# Altium PCB PCB_sonnn_2_2025-09-09.pcbdoc (part 1 of 2)
Units mm, origin at the board's own origin, x right, y up, seen from the top; angles counter-clockwise.
Board outline 165.65 x 105.65 mm, 2 copper layers (Top Layer, Bottom Layer); 104 components, 42 nets, 251 pads, 109 vias.
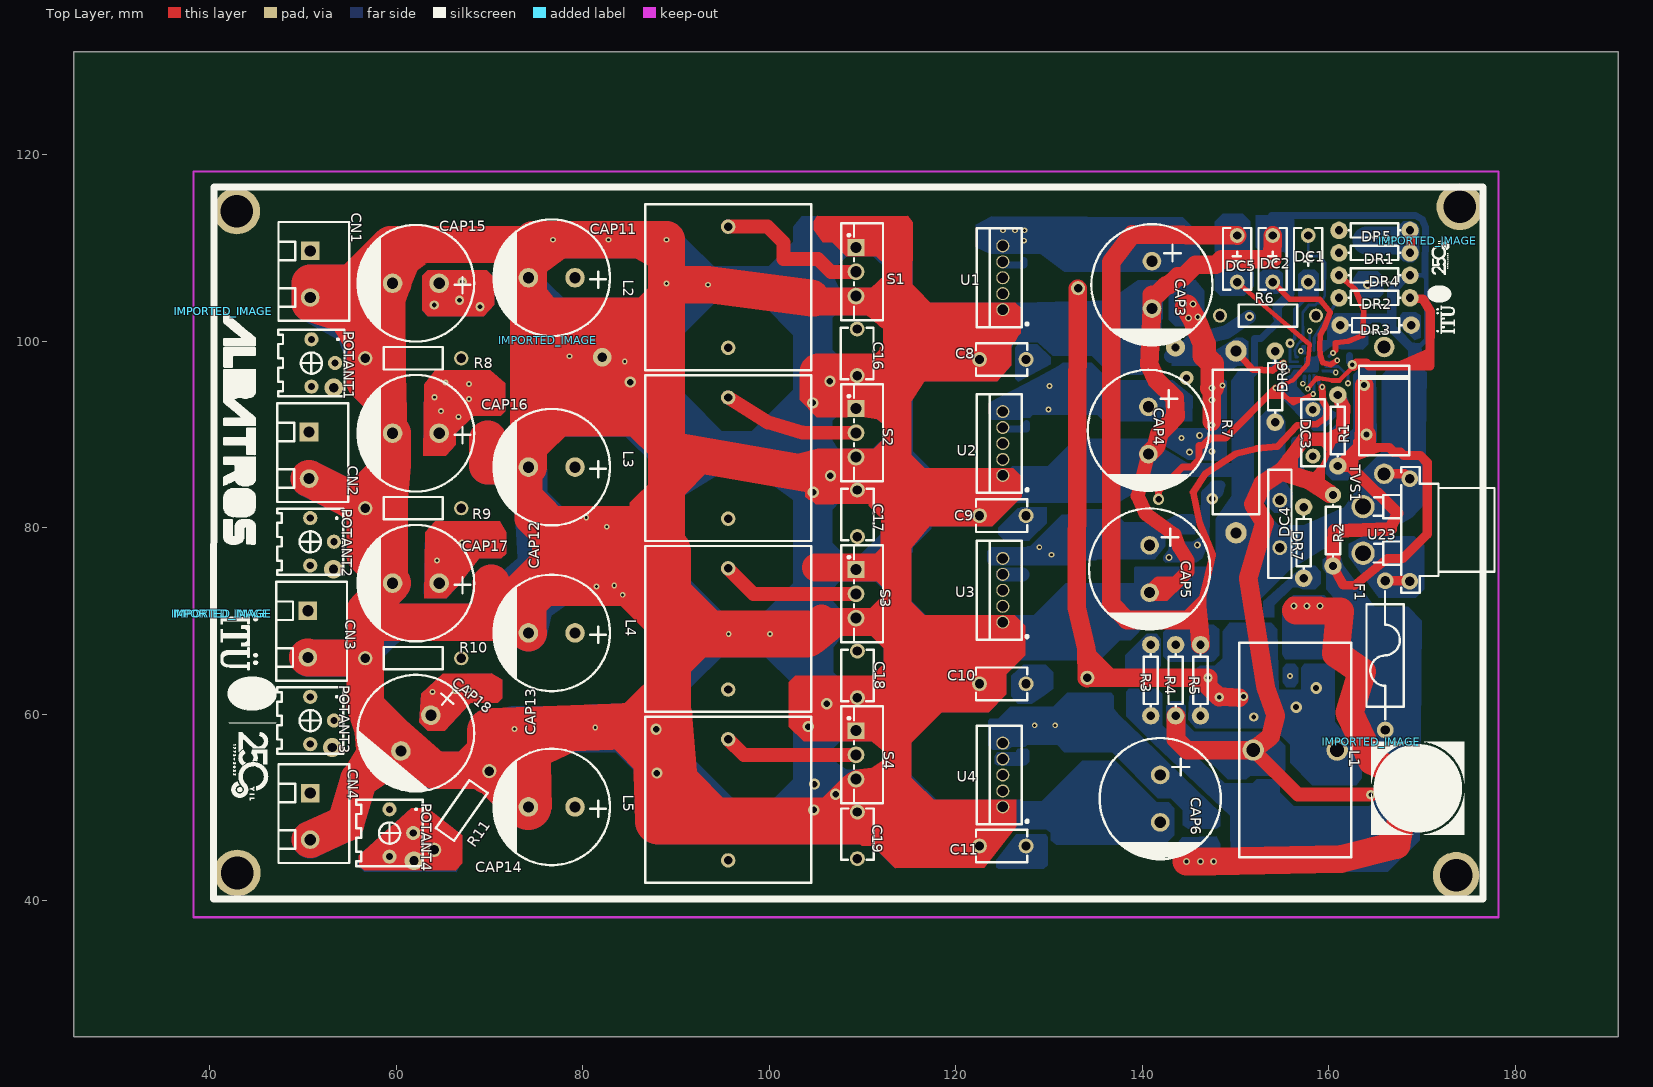
[diagram p0: Top Layer view]
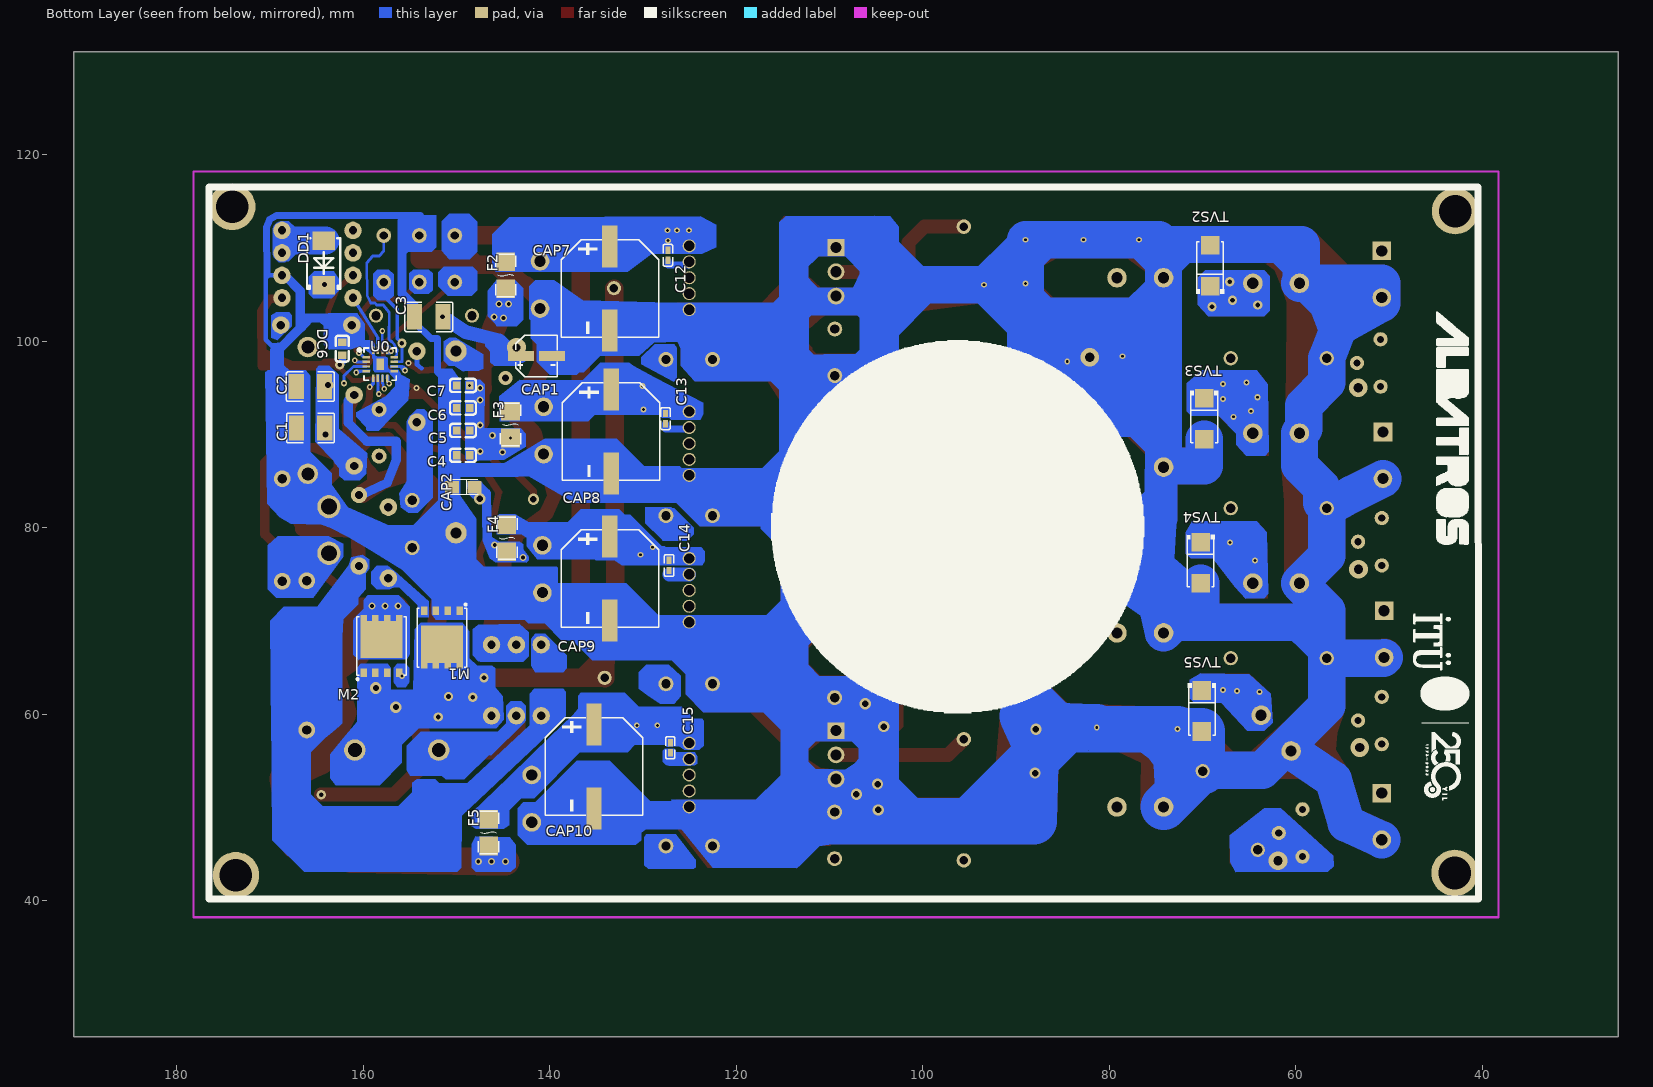
[diagram p1: Bottom Layer view, seen from below]

## Layer stack, top to bottom
Top Layer: signal copper (thickness not stored)
Dielectric: dielectric 0.32, FR-4, Dk 4.8
Bottom Layer: signal copper (thickness not stored)

## Board outline
191.054,25.4 25.4,25.4 25.4,131.054 191.054,131.054

## Components (designator, comment, footprint, x,y, rotation, side; value= is the part's Value field where it differs from the comment)
C1 "10uF" C1210 165.666,90.709 r0 bottom
C2 "10uF" C1210 165.685,95.142 r0 bottom
C3 "10uF" C1210 152.985,102.635 r0 bottom
C4 "47uF" C0603 149.302,87.776 r0 bottom
C5 "47uF" C0603 149.302,90.443 r0 bottom
C6 "47uF" C0603 149.302,92.856 r0 bottom
C7 "47uF" C0603 149.302,95.269 r0 bottom
C8 "1uF" CAP-TH_L5.5-W3.5-P5.00-D1.2 125.045,98.064 r180 top
C9 "1uF" CAP-TH_L5.5-W3.5-P5.00-D1.2 125.045,81.3 r180 top
C10 "1uF" CAP-TH_L5.5-W3.5-P5.00-D1.2 125.045,63.265 r180 top
C11 "1uF" CAP-TH_L5.5-W3.5-P5.00-D1.2 125.045,45.866 r180 top
C12 "1uF" C0402 127.331,109.24 r270 bottom
C13 "1uF" C0402 127.585,91.714 r270 bottom
C14 "1uF" C0402 127.204,75.966 r270 bottom
C15 "1uF" C0402 127.077,56.408 r90 bottom
C16 "1uF" CAP-TH_L5.5-W3.5-P5.00-D1.2 109.424,98.826 r270 top
C17 "1uF" CAP-TH_L5.5-W3.5-P5.00-D1.2 109.448,81.556 r270 top
C18 "1uF" CAP-TH_L5.5-W3.5-P5.00-D1.2 109.448,64.281 r270 top
C19 "1uF" CAP-TH_L5.5-W3.5-P5.00-D1.2 109.448,47.009 r90 top
CAP1 "1uF" CAP-SMD_BD4.0-L4.3-W4.3-FD-LS5.3 141.428,98.444 r0 bottom
CAP2 "68uF" CASE-A_3216 149.304,84.347 r180 bottom
CAP3 "470uF" CAP-TH_BD13.0-P5.00-D1.2-FD 141.049,106.064 r270 top
CAP4 "470uF" CAP-TH_BD13.0-P5.00-D1.2-FD 140.668,90.443 r270 top
CAP5 "470uF" CAP-TH_BD13.0-P5.00-D1.2-FD 140.795,75.584 r270 top
CAP6 "470uF" CAP-TH_BD13.0-P5.00-D1.2-FD 141.938,50.946 r270 top
CAP7 "220uF" CAP-SMD_BD10.0-L10.3-W10.3-LS11.0-FD 133.554,105.684 r90 bottom
CAP8 "220uF" CAP-SMD_BD10.0-L10.3-W10.3-LS11.0-FD 133.427,90.317 r90 bottom
CAP9 "220uF" CAP-SMD_BD10.0-L10.3-W10.3-LS11.0-FD 133.554,74.569 r90 bottom
CAP10 "220uF" CAP-SMD_BD10.0-L10.3-W10.3-LS11.0-FD 135.266,54.409 r90 bottom
CAP11 "1000uF" CAP-TH_BD12.5-P5.00-D0.6-FD 76.66,106.826 r180 top
CAP12 "1000uF" CAP-TH_BD12.5-P5.00-D0.6-FD 76.66,86.506 r180 top
CAP13 "1000uF" CAP-TH_BD12.5-P5.00-D0.6-FD 76.66,68.726 r180 top
CAP14 "1000uF" CAP-TH_BD12.5-P5.00-D0.6-FD 76.66,50.057 r180 top
CAP15 "1000uF" CAP-TH_BD12.5-P5.00-D0.6-FD 62.088,106.234 r180 top
CAP16 "1000uF" CAP-TH_BD12.5-P5.00-D0.6-FD 62.088,90.146 r180 top
CAP17 "1000uF" CAP-TH_BD12.5-P5.00-D0.6-FD 62.088,74.06 r180 top
CAP18 "1000uF" CAP-TH_BD12.5-P5.00-D0.6-FD 62.088,57.974 r230 top
CN1 "MX301-5.0-02P-BU01-CU-Y-A" CONN-TH_2P-P5.0-MX301-5.0-02P-BU01-CU-Y-A 50.751,107.207 r270 top
CN2 "MX301-5.0-02P-BU01-CU-Y-A" CONN-TH_2P-P5.0-MX301-5.0-02P-BU01-CU-Y-A 50.624,87.776 r270 top
CN3 "MX301-5.0-02P-BU01-CU-Y-A" CONN-TH_2P-P5.0-MX301-5.0-02P-BU01-CU-Y-A 50.497,68.599 r270 top
CN4 "MX301-5.0-02P-BU01-CU-Y-A" CONN-TH_2P-P5.0-MX301-5.0-02P-BU01-CU-Y-A 50.751,49.041 r270 top
DC1 "100nF" CAP-TH_L6.5-W3.0-P5.00-D0.6 157.811,108.858 r270 top
DC2 "100nF" CAP-TH_L6.5-W3.0-P5.00-D0.6 154.001,108.858 r270 top
DC3 "1.2nF" CAP-TH_L7.2-W2.5-P5.00-D0.5 158.319,90.189 r270 top
DC4 "22nF" CAP-TH_L11.5-W2.5-P5.00-D1.0 154.763,80.41 r90 top
DC5 "100pF" CAP-TH_L6.5-W3.0-P5.00-D0.6 150.191,108.858 r270 top
DC6 "0.1uF" C0603 162.266,99.209 r90 bottom
DD1 "SS1060-SMB" SMB_L4.4-W3.6-LS5.3-RD 164.266,108.409 r270 bottom
DR1 "1k" R_AXIAL-0.3#1 164.923,109.493 r0 top
DR2 "357k" R_AXIAL-0.3#1 164.923,104.667 r0 top
DR3 "47.5k" R_AXIAL-0.3#1 165.05,101.747 r0 top
DR4 "76.8k" R_AXIAL-0.3#1 164.923,107.08 r0 top
DR5 "2.0" R_AXIAL-0.3#1 164.923,111.906 r0 top
DR6 "15.4k" R_AXIAL-0.3#1 154.255,95.142 r90 top
DR7 "2" R_AXIAL-0.3#1 157.316,78.409 r270 top
F1 "32NM-150H" FUSE-TH_BD4.0-L11.0-P15.00-D0.6 166.066,66.313 r270 top
F2 "JFC1206-1800FS" F1206 144.73,107.08 r270 bottom
F3 "JFC1206-1800FS" F1206 144.222,91.078 r270 bottom
F4 "JFC1206-1800FS" F1206 144.603,78.886 r270 bottom
F5 "JFC1206-1800FS" F1206 146.566,47.309 r270 bottom
IMPORTED_IMAGE "IMPORTED_IMAGE" IMPORTED_IMAGE 41.372,70.755 r0 top
IMPORTED_IMAGE "IMPORTED_IMAGE" IMPORTED_IMAGE 41.416,103.206 r0 top
IMPORTED_IMAGE "IMPORTED_IMAGE" IMPORTED_IMAGE 76.225,100.127 r0 top
IMPORTED_IMAGE "IMPORTED_IMAGE" IMPORTED_IMAGE 170.614,110.821 r0 top
IMPORTED_IMAGE "IMPORTED_IMAGE" IMPORTED_IMAGE 164.575,57.059 r0 top
IMPORTED_IMAGE "IMPORTED_IMAGE" IMPORTED_IMAGE 41.416,103.206 r0 top
IMPORTED_IMAGE "IMPORTED_IMAGE" IMPORTED_IMAGE 41.132,70.755 r0 top
L1 "22uH" IND-TH_L23.0-W12.0-P9.00-D1.3 156.414,56.153 r270 top
L2 "47uH" IND-TH_L17.8-W17.8-P13.00-D0.6 95.582,105.811 r270 top
L3 "47uH" IND-TH_L17.8-W17.8-P13.00-D0.6 95.582,87.48 r270 top
L4 "47uH" IND-TH_L17.8-W17.8-P13.00-D0.6 95.582,69.15 r270 top
L5 "47uH" IND-TH_L17.8-W17.8-P13.00-D0.6 95.582,50.82 r270 top
M1 "BSC123N08NS3G" PG-TDSON-8_L5.0-W6.0-P1.27-LS6.2-BL-EP 151.588,68.219 r180 bottom
M2 "BSC123N08NS3G" PG-TDSON-8_L5.0-W6.0-P1.27-LS6.2-BL-EP 158.066,67.309 r0 bottom
POTANT1 "30kΩ" RES-ADJ-TH_3362P 52.148,97.682 r270 top
POTANT2 "30kΩ" RES-ADJ-TH_3362P 52.021,78.505 r270 top
POTANT3 "30kΩ" RES-ADJ-TH_3362P 52.021,59.328 r270 top
POTANT4 "30kΩ" RES-ADJ-TH_3362P 60.53,47.263 r270 top
R1 "10m" R_AXIAL-0.3#1 160.986,90.443 r90 top
R2 "10m" R_AXIAL-0.3#2 160.466,79.709 r90 top
R3 "10" R_AXIAL-0.3#1 140.92,63.646 r270 top
R4 "10" R_AXIAL-0.3#1 143.587,63.646 r270 top
R5 "NOT POPULATED" R_AXIAL-0.3#1 146.254,63.646 r270 top
R6 "523kΩ" RES-TH_BD2.4-L6.3-P10.30-D0.6 153.493,102.762 r0 top
R7 "22kΩ" RES-TH_BD5.0-L15.5-P19.50-D0.8 150.066,89.209 r270 top
R8 "1kΩ" RES-TH_BD2.4-L6.3-P10.30-D0.6 61.8,98.19 r180 top
R9 "1kΩ" RES-TH_BD2.4-L6.3-P10.30-D0.6 61.8,82.104 r180 top
R10 "1kΩ" RES-TH_BD2.4-L6.3-P10.30-D0.6 61.8,66.016 r180 top
R11 "1kΩ" RES-TH_BD2.4-L6.3-P10.30-D0.6 67.007,49.676 r55 top
S1 "MBRF2060CTDH" ITO-220AB-3_L10.2-W4.5-P2.60-L 109.298,107.46 r270 top
S2 "MBRF2060CTDH" ITO-220AB-3_L10.2-W4.5-P2.60-L 109.298,90.188 r270 top
S3 "MBRF2060CTDH" ITO-220AB-3_L10.2-W4.5-P2.60-L 109.298,72.916 r270 top
S4 "MBRF2060CTDH" ITO-220AB-3_L10.2-W4.5-P2.60-L 109.298,55.641 r270 top
TVS1 "1.5KE27A_C521812" DO-201_BD5.3-L9.5-P13.50-D1.4-RD 165.96,92.595 r270 top
TVS2 "SM4T26AY" SMA_L4.3-W2.6-LS5.1-RD 69.165,108.097 r270 bottom
TVS3 "SM4T26AY" SMA_L4.3-W2.6-LS5.1-RD 69.8,91.714 r90 bottom
TVS4 "SM4T26AY" SMA_L4.3-W2.6-LS5.1-RD 70.181,76.26 r90 bottom
TVS5 "SM4T26AY" SMA_L4.3-W2.6-LS5.1-RD 70.054,60.345 r90 bottom
U0 "TPS43060RTER" WQFN-16_L3.0-W3.0-P0.50-TL-EP 158.192,97.556 r0 bottom
U1 "XL4016" TO220-5L_L10.16-W4.5-P1.71-L 125.045,106.826 r90 top
U2 "XL4016" TO220-5L_L10.16-W4.5-P1.71-L 125.045,89.046 r90 top
U3 "XL4016" TO220-5L_L10.16-W4.5-P1.71-L 125.045,73.298 r90 top
U4 "XL4016" TO220-5L_L10.16-W4.5-P1.71-L 125.045,53.486 r90 top
U23 "XT30PW-F" CONN-TH_XT30PW-F-1 166.193,79.776 r90 top

## Footprints (in the part's own frame and the unit in brackets; to place one, negate y for a bottom-side part, rotate by r counter-clockwise, add the part's x,y. Pads: shape width x height; smd on the part's side, far side on the other; paste and mask are expansions set on the pad)
C0402 [mm]
  rect 0.79x0.54 smd paste-100 mask+0.051: 1(0.545,0) 2(-0.545,0)
  silkscreen extent -1.17,-0.5 1.17,0.5
C0603 [mm]
  rect 0.8x0.9 smd paste+0 mask+0.051: 1(0.7,0) 2(-0.7,0)
  silkscreen extent -1.39,-0.72 1.41,0.71
C1210 [mm]
  rect 1.635x2.7 smd paste-100 mask+0.051: 1(1.517,0) 2(-1.517,0)
  silkscreen extent -2.56,-1.58 2.56,1.58
CAP-SMD_BD4.0-L4.3-W4.3-FD-LS5.3 [mm]
  rect 2.8x1.1 smd paste+0 mask+0.051: 1(1.66,0) 2(-1.66,0)
  silkscreen extent -2.24,-2.23 2.22,2.23
CAP-SMD_BD10.0-L10.3-W10.3-LS11.0-FD [mm]
  rect 4.5x1.65 smd paste+0 mask+0.051: 1(4.5,0) 2(-4.5,0)
  silkscreen extent -5.23,-5.23 5.23,5.23
CAP-TH_BD12.5-P5.00-D0.6-FD [mm]
  round 2.1 hole 1.2 paste+0 mask+0.05: 1(-2.5,0) 2(2.5,0)
  silkscreen extent -6.25,-6.25 6.25,6.25
CAP-TH_BD13.0-P5.00-D1.2-FD [mm]
  round 2 hole 1.2 paste+0 mask+0.051: 1(-2.54,0) 2(2.54,0)
  silkscreen extent -6.5,-6.5 6.5,6.5
CAP-TH_L5.5-W3.5-P5.00-D1.2 [mm]
  round 1.6 hole 1 paste+0 mask+0.051: 1(-2.5,0) 2(2.5,0)
  silkscreen extent -2.62,-1.75 2.88,1.75
CAP-TH_L6.5-W3.0-P5.00-D0.6 [mm]
  round 1.6 hole 0.9 paste+0 mask+0.05: 1(-2.5,0) 2(2.5,0)
  silkscreen extent -3.3,-1.52 3.3,1.52
CAP-TH_L7.2-W2.5-P5.00-D0.5 [mm]
  round 1.6 hole 0.8 paste+0 mask+0.05: 1(-2.5,0) 2(2.5,0)
  silkscreen extent -3.6,-1.25 3.6,1.25
CAP-TH_L11.5-W2.5-P5.00-D1.0 [mm]
  round 1.6 hole 1 paste+0 mask+0.051: 1(-2.54,0) 2(2.54,0)
  silkscreen extent -5.8,-1.25 5.8,1.25
CASE-A_3216 [mm]
  rect 1.5x1.359 smd paste+0 mask+0.051: 1(1.2,0) 2(-1.2,0)
  silkscreen extent -1.6,-0.8 1.6,0.8
CONN-TH_2P-P5.0-MX301-5.0-02P-BU01-CU-Y-A [mm]
  rect 2x2 hole 1.2 paste+0 mask+0.051: 1(-2.5,0)
  round 2 hole 1.2 paste+0 mask+0.051: 2(2.5,0)
  silkscreen extent -5.6,-3.4 5,4.2
CONN-TH_XT30PW-F-1 [mm]
  round 2.5 hole 1.7 paste+0 mask+0.051: 1(-2.5,2.5) 2(2.5,2.5)
  round 1.8 hole 1 paste+0 mask+0.051: 3(5.5,-2.5) 4(-5.5,-2.5)
  silkscreen extent -6.75,-11.6 6.75,1.35
DO-201_BD5.3-L9.5-P13.50-D1.4-RD [mm]
  round 2.2 hole 1.4 paste+0 mask+0.051: 1(-6.8,0) 2(6.8,0)
  silkscreen extent -4.8,-2.7 4.8,2.7
F1206 [mm]
  rect 2x2 smd paste+0 mask+0.051: 1(1.445,0) 2(-1.445,0)
  silkscreen extent -2.27,-1.09 2.27,1.09
FUSE-TH_BD4.0-L11.0-P15.00-D0.6 [mm]
  round 1.8 hole 1 paste+0 mask+0.051: 1(-8,0) 2(8,0)
  silkscreen extent -6.87,-2 6.87,2
IMPORTED_IMAGE [mm]
IND-TH_L17.8-W17.8-P13.00-D0.6 [mm]
  round 1.55 hole 0.9 paste+0 mask+0.05: 1(-6.5,0) 2(6.5,0)
  silkscreen extent -8.9,-8.9 8.9,8.9
IND-TH_L23.0-W12.0-P9.00-D1.3 [mm]
  round 2.3 hole 1.5 paste+0 mask+0.05: 1(0,-4.5) 2(0,4.5)
  silkscreen extent -11.5,-6 11.5,6
ITO-220AB-3_L10.2-W4.5-P2.60-L [mm]
  rect 1.8x1.8 hole 1.2 paste+0 mask+0.051: 1(-2.6,0)
  round 1.8 hole 1.2 paste+0 mask+0.051: 2(0,0) 3(2.6,0)
  silkscreen extent -5.2,-1.6 5.2,2.9
PG-TDSON-8_L5.0-W6.0-P1.27-LS6.2-BL-EP [mm]
  rect 0.7x0.925 smd paste-100 mask+0.051: 1(1.905,2.865) 2(0.635,2.865) 3(-0.635,2.865) 4(-1.905,2.865) 5(-1.905,-2.865) 6(-0.635,-2.865) 7(0.635,-2.865) 8(1.905,-2.865)
  rect 4.5x4 smd paste-100 mask+0.05: 9(0,-0.705)
  silkscreen extent -2.65,-3.15 2.66,3.66
R_AXIAL-0.3#1 [mil]
  round 74 hole 35.4 paste+0 mask+2: 1(-150,0) 2(150,0)
  silkscreen extent -110,-30 110,30
R_AXIAL-0.3#2 [mil]
  round 74 hole 35.4 paste+0 mask+2: 1(-150,0)
  round 68.9 hole 35.4 paste+0 mask+2: 2(150,0)
  silkscreen extent -110,-30 110,30
RES-ADJ-TH_3362P [mil]
  round 60 hole 30 paste+0 mask+2: 1(-100,-50) 2(0,50) 3(100,-50)
  silkscreen extent -140,-190 140,90
RES-TH_BD2.4-L6.3-P10.30-D0.6 [mm]
  round 1.524 hole 1 paste+0 mask+0.051: 1(-5.15,0) 2(5.15,0)
  silkscreen extent -3.15,-1.2 3.15,1.2
RES-TH_BD5.0-L15.5-P19.50-D0.8 [mm]
  round 2.3 hole 1.2 paste+0 mask+0.051: 1(-9.75,0) 2(9.75,0)
  silkscreen extent -7.75,-2.5 7.75,2.5
SMA_L4.3-W2.6-LS5.1-RD [mm]
  rect 2x2 smd paste+0 mask+0.051: 1(2.2,0) 2(-2.2,0)
  silkscreen extent -2.6,-1.5 2.98,1.5
SMB_L4.4-W3.6-LS5.3-RD [mm]
  rect 2x2.4 smd paste+0 mask+0.051: 1(2.4,0) 2(-2.4,0)
  silkscreen extent -2.67,-1.78 2.76,1.78
TO220-5L_L10.16-W4.5-P1.71-L [mm]
  round 1.4 hole 1.1 paste+0 mask+0.051: 1(-3.42,0) 2(-1.71,0) 3(0,0) 4(1.71,0) 5(3.42,0)
  silkscreen extent -5.3,-2.76 5.3,2.78
WQFN-16_L3.0-W3.0-P0.50-TL-EP [mm]
  rect 0.8x0.25 smd paste+0 mask+0.025: 1(1.5,-0.749) 2(1.5,-0.249) 3(1.5,0.249) 4(1.5,0.749) 9(-1.5,0.749) 10(-1.5,0.249) 11(-1.5,-0.249) 12(-1.5,-0.749)
  rect 0.25x0.8 smd paste+0 mask+0.025: 5(0.749,1.5) 6(0.249,1.5) 7(-0.249,1.5) 8(-0.749,1.5) 13(-0.749,-1.5) 14(-0.249,-1.5) 15(0.249,-1.5) 16(0.749,-1.5)
  rect 0.8x1.2 smd paste+0 mask+0.051: 17(0,0)
  silkscreen extent -1.72,-1.72 2.38,1.72

## Free pads (board coordinates)
  round 1.524 hole 0.914 paste+0 mask+0.051: 1(133.116,105.709) 2(134.116,63.909)
  round 5 hole 3.5 paste+0.102 mask+0.051: 3(42.877,113.977) 3(42.927,42.977) 3(173.677,42.727) 3(174.077,114.427)

## Via types
v1: diameter 0.62, hole 0.31, Top Layer to Bottom Layer, tented both sides, 18 vias
v2: diameter 0.75, hole 0.4, Top Layer to Bottom Layer, tented both sides, 18 vias
v3: diameter 0.65, hole 0.31, Top Layer to Bottom Layer, tented both sides, 18 vias
v4: diameter 0.61, hole 0.31, Top Layer to Bottom Layer, tented both sides, 16 vias
v5: diameter 1.2, hole 0.7, Top Layer to Bottom Layer, tented both sides, 14 vias
v6: diameter 1, hole 0.5, Top Layer to Bottom Layer, tented both sides, 13 vias
v7: diameter 2, hole 1, Top Layer to Bottom Layer, tented both sides, 5 vias
v8: diameter 1.25, hole 0.65, Top Layer to Bottom Layer, tented both sides, 4 vias
v9: diameter 2, hole 0.85, Top Layer to Bottom Layer, tented both sides, 1 vias
v10: diameter 0.61, hole 0.3, Top Layer to Bottom Layer, tented both sides, 1 vias
v11: diameter 1.5, hole 0.75, Top Layer to Bottom Layer, tented both sides, 1 vias

## Nets (pads, with @x,y where several pads share a name; then routed paths per layer and width w, separated by ;. In a path a pad name is that pad's centre, name@x,y a point inside that pad or via, vN(x,y) a via of type N, cw(c..) or ccw(c..) an arc to the next point about the centre after c; other vN are vias at no path point)
C4_2: C4.2 C5.2 C6.2 C7.2 CAP2.1 F2.1 F3.1 F4.1 F5.1 M2.5 M2.6 M2.7 M2.8 M2.9 R6.2 | length 250.4
  Top Layer w2: 147.466,91.409 v2@147.466,95.01 ; v2(156.266,71.609) v2(159.066,71.609)
  Top Layer w2.5: 144.788,103.779 145.626,102.265 145.768,101.93 146.667,99.71 146.667,98.461 147.516,97.61 147.516,95.059 v2(147.466,95.009)
  Top Layer w3: v2@144.766,44.209 v2(146.266,44.209) v2(147.666,44.209) ; v2(147.666,44.209) 161.327,44.477 167.277,45.977 168.577,53.127 164.676,54.976 162.227,60.178 163.576,64.577 160.764,66.505 161.221,71.051 156.5,71.153
  Mid-Layer 1 w0.75: v1@148.601,95.27 151.066,95.509 151.865,96.41 152.566,100.809 154.466,102.46 157.166,102.709 R6.2@158.643,102.762
  Mid-Layer 1 w1: v2(144.406,104.009) v2(145.446,104.009) ; v2(147.466,95.009) 148.342,95.009 v1(148.602,95.27)
  Mid-Layer 1 w1.5: v2(145.446,104.009) 145.916,104.009 146.816,104.909 148.816,104.909 148.918,104.998 150.016,104.609 156.797,104.609 R6.2@158.643,102.762
  Mid-Layer 1 w2: v2(147.466,88.209) 147.466,90.444 ; 147.666,94.259 148.083,95.009
  Mid-Layer 1 w3: v2(144.406,104.009) 144.666,104.009 145.216,103.459 ; 145.027,89.077 145.859,89.909 v2(146.166,89.909) ; 145.142,88.867 147.377,86.632 147.377,86.174 ; v2@147.466,88.208 147.516,88.158 v5(147.516,83.11) ; v5(147.516,83.11) 145.966,81.559 145.966,79.459 144.066,77.559 144.066,76.659 148.616,72.109 155.499,72.109 156.236,71.372 v2@157.633,71.372 ; v2@157.734,71.338 158.539,71.375
  Mid-Layer 2 w2.5: v2(144.966,102.509) 144.966,102.109 146.666,99.659 147.516,94.959 146.866,89.909
  Mid-Layer 2 w2.75: 146.365,44.811 150.377,46.777 154.277,48.727 157.827,51.177 162.077,52.377 164.676,54.976 162.227,60.178 163.576,64.577 158.565,68.011 158.466,68.11
  Mid-Layer 2 w3: 143.416,76.209 145.366,78.159 v2(145.916,78.159) 145.916,81.26 v5(147.516,83.11) ; 144.564,77.412 144.716,75.359 146.962,74.31 149.077,72.027 154.477,71.977 ; v2(147.466,95.009) 147.516,94.959 v5(147.516,83.11)
  Bottom Layer w0.254: C4.2@148.602,87.776 C5.2@148.602,90.443 C6.2@148.602,92.856 v1(148.602,95.27)
  Bottom Layer w1: F4.1@144.565,77.411 146.716,78.759 146.816,83.702 147.664,84.551 147.006,83.215 147.435,83.324 147.677,84.589 148.413,84.576 148.243,83.84 v5@147.517,83.111
  other v1: 144.222,89.634
  other v2: 144.766,44.209 157.666,71.609 142.866,76.809 145.066,88.11 147.466,91.009 147.466,93.709 145.966,102.609
DR1_1: DR1.1 U0.14 | length 14
  Mid-Layer 2 w0.5: v4(157.966,101.11) 157.31,101.328 156.365,102.26 156.365,103.309 157.564,104.409 158.834,104.521 159.466,105.603 159.365,108.011 DR1.1@161.113,109.493
  Bottom Layer w0.3: U0.14@157.943,99.056 157.946,99.349 v4(157.966,101.11)
DR2_1: DR2.1 DR3.2 U0.15 | length 15
  Mid-Layer 1 w0.254: DR3.2@168.86,101.747 DR3.2@168.86,102.128
  Mid-Layer 2 w0.75: DR2.1@161.113,104.667 162.266,104.01 164.34,103.36 166.666,102.509 DR3.2@168.86,101.747
  Bottom Layer w0.35: U0.15@158.441,99.057 158.466,100.409 DR2.1@161.113,104.667
DR4_1: DR4.1 U0.1 | length 12.3
  Top Layer w0.6: v4(160.466,98.76) 160.735,99.028 160.735,99.842 162.127,100.009 163.634,100.617 163.765,103.309 162.866,105.61 DR4.1@161.113,107.08
  Bottom Layer w0.35: U0.1@160.028,98.371 160.416,98.759 v4(160.466,98.76)
DR6_1: DC4.2 DR6.1
DR6_2: DC3.2 DR6.2 U0.3 | length 29.1
  Mid-Layer 2 w0.5: DR6.2@154.255,98.952 154.826,100.876 156.327,100.876 157.127,100.076 160.754,100.076 161.677,99.127 161.643,97.594 161.376,97.328 161.475,96.977 162.065,96.538 162.065,95.509 162.677,94.899 162.677,93.784 162.377,92.677 158.318,88.618 DC3.2@158.319,87.689
  Bottom Layer w0.3: U0.3@159.692,97.307 161.066,97.307 162.066,96.307 v3(162.066,95.509)
  Bottom Layer w0.5: 153.766,97.109 154.243,97.497 DR6.2@154.255,98.952
F1_1: F1.1 TVS1.1 U23.1 U23.4 | length 53.8
  Top Layer w1: F1.1@166.066,74.313 168.655,74.313 U23.4@168.693,74.275
  Mid-Layer 1 w0.254: U23.1@163.526,77.108 U23.1@163.693,77.275 ; F1.1@166.066,74.313 166.104,74.275 U23.4@168.693,74.275
  Mid-Layer 1 w2.3: 156.964,90.31 161.011,90.31 164.028,93.327 167.056,93.327 167.056,98.298 TVS1.1@165.96,99.395
  Mid-Layer 1 w2.5: 156.965,90.309 156.165,89.308 155.467,88.31 151.266,86.359 151.316,82.659 153.266,80.509 155.316,80.509 158.37,78.175 161.167,79.91 U23.1@163.694,77.276
  Mid-Layer 1 w3: U23.1@163.694,77.276 F1.1@166.066,74.315
F2_2: C8.1 C12.2 CAP3.1 CAP7.1 F2.2 U1.5 | length 25.1
  Mid-Layer 1 w3: 124.266,110.909 124.916,111.459 133.666,111.459 136.521,108.605 CAP3.1@141.049,108.605
  Mid-Layer 2 w1: v4(125.066,111.909) v4(127.366,111.909) 127.366,110.844 v4(127.331,110.809)
  Bottom Layer w0.75: U1.5@125.045,110.248 125.609,110.809 v4(127.331,110.809) C12.2@127.331,109.786
  other v4: 126.366,111.909
F4_2: C10.1 C14.2 CAP5.1 CAP9.1 F4.2 U3.5 | length 14.9
  Bottom Layer w0.254: CAP9.1@133.554,79.069 134.498,78.125 CAP5.1@140.795,78.125 143.002,80.332 F4.2@144.603,80.331
  Bottom Layer w0.75: U3.5@125.045,76.72 125.045,76.91 126.806,76.91 C14.2@127.204,76.512
  other v4: 130.266,77.11 128.966,77.909
F5_2: C11.1 C15.1 CAP6.1 CAP10.1 F5.2 U4.5 | length 2
  Bottom Layer w0.75: U4.5@125.099,56.874 C15.1@127.077,56.953
  other v4: 128.466,58.809 130.666,58.809
FB: R6.1 R7.1 U0.4 | length 17.1
  Top Layer w0.75: R7.1@150.066,98.959 151.866,96.959 153.966,96.859 154.466,97.259 v3(155.166,97.659)
  Mid-Layer 2 w0.3: v3(155.166,97.659) 155.516,98.009 156.416,98.009 157.266,97.159 158.816,97.159 159.316,96.659 v4(160.766,96.659)
  Mid-Layer 2 w2: R6.1@148.343,102.762 149.666,101.44 149.666,100.759 150.066,100.359 R7.1@150.066,98.959
GND: C1.1 C2.1 C3.1 C4.1 C5.1 C6.1 C7.1 C8.2 C9.2 C10.2 C11.2 C16.2 C17.1 C18.2 C19.2 CAP1.2 CAP2.2 CAP3.2 CAP4.2 CAP5.2 CAP6.2 CAP7.2 CAP8.2 CAP9.2 CAP10.2 CAP11.2 CAP12.2 CAP13.2 CAP14.2 CAP15.2 CAP16.2 CAP17.2 CAP18.2 CN1.2 CN2.2 CN3.2 CN4.2 DC2.1 DC3.1 DC4.1 DC6.1 DR3.1 DR4.2 M1.1 M1.2 M1.3 R7.2 R8.2 R9.2 R10.2 R11.2 S1.1 S1.3 S2.1 S2.3 S3.1 S3.3 S4.1 S4.3 TVS1.2 TVS2.2 TVS3.2 TVS4.2 TVS5.2 U0.9 U0.16 U0.17 U1.1 U2.1 U3.1 U4.1 U23.2 U23.3 | length 1757.2
  Top Layer w1: CAP3.2@141.055,103.121 CAP3.2@141.055,103.458 ; TVS1.2@165.96,85.795 168.174,85.795 U23.3@168.693,85.275
  Top Layer w1.5: CAP4.2@140.668,87.904 139.516,83.409 140.416,81.459 143.466,79.259 143.966,77.959 144.866,76.509 144.866,75.309 143.566,74.009 141.759,74.009 CAP5.2@140.795,73.045
  Top Layer w2: CAP4.2@140.666,87.904 141.466,88.701 141.866,90.159 142.616,90.909 143.616,91.959 143.466,93.959 141.566,95.759 140.766,97.459 141.047,103.525 141.047,105.01 141.565,105.01 142.566,106.009 142.866,106.009 143.816,106.959 144.466,106.959 145.716,108.208 147.915,108.208 148.515,108.81 153.956,108.81 DC2.1@154.001,111.359
  Top Layer w3: CAP12.2@74.16,86.519 74.16,80.958 77.617,77.502 ; 104.853,104.172 104.98,104.299 113.616,104.299 ; 104.98,75.724 113.743,75.724 ; 105.615,70.263 105.996,69.882 112.6,69.882 ; 106.123,87.027 113.108,87.027 113.743,87.662 ; 106.885,84.051 113.743,84.051 ; 109.806,48.546 112.219,48.546 112.981,47.784 113.616,47.784 113.743,47.911 113.743,75.724 ; 113.743,111.792 113.743,75.724
  Top Layer w4: CN3.2@50.498,66.112 50.581,66.029 R10.2@56.651,66.029 ; CN2.2@50.625,85.289 53.966,83.609 R9.2@56.651,82.117 ; CN4.2@50.753,46.555 54.566,48.309 55.966,53.009 60.481,56.072 59.727,57.827 64.086,54.007 69.863,54.007 R11.2@69.962,53.908 ; 58.879,69.882 73.017,69.882 CAP13.2@74.16,68.739 ; 59.588,57.987 56.651,60.924 R10.2@56.651,66.029 ; CAP15.2@59.588,106.248 59.387,106.448 59.387,110.395 67.205,110.395 74.16,110.395 ; CAP15.2@59.589,106.247 50.75,106.247 50.75,104.104 54.666,102.859 55.916,100.759 59.587,106.235 56.651,98.203 56.651,95.605 59.133,93.123 59.133,90.614 59.588,90.159 59.588,86.721 57.228,84.36 57.228,82.694 R9.2@56.651,82.117 ; 69.801,89.526 69.801,86.646 74.033,86.646 74.16,86.519 74.16,106.839 74.16,110.395 ; 69.997,69.882 77.617,77.502 89.105,77.502 88.978,77.629 v1(88.978,110.904) ; 70.182,72.041 70.182,74.073 ; 74.16,91.776 88.978,91.776 ; 74.16,102.698 88.978,102.698 ; 88.978,88.424 104.976,85.649 ; 104.466,104.659 v1(93.418,106.078) 89.105,106.077 v1(88.978,106.205) v1(88.978,110.904) ; v5@104.599,59.087 112.219,59.087 112.219,62.135 104.853,62.135 ; 105.234,96.679 110.314,96.679 111.076,95.917 111.076,94.012 107.139,94.012 ; R10.2@56.651,66.029 56.651,71.136 59.588,74.073 56.651,77.01 R9.2@56.651,82.117 ; 74.16,110.395 74.668,110.903 v1(76.796,110.904) v1(82.745,110.904) v1(88.978,110.904)
  Top Layer w5: CAP14.2@74.16,50.07 70.323,53.908 69.962,53.908 70.055,54 70.055,58.157 84.567,58.722 89.067,59.622 89.268,59.821 87.868,56.723 v5(87.95,53.686) 88.089,48.546 109.806,48.546 109.806,51.594 ; v5@87.962,58.833 89.105,59.976 89.105,77.502 ; 89.105,68.648 89.141,68.612 103.964,68.612
  Mid-Layer 1 w0.254: U23.2@163.694,82.275 163.693,83.529 165.96,85.795 168.174,85.795 U23.3@168.693,85.275
  Mid-Layer 1 w1: R7.2@150.067,79.461 151.166,77.859 152.966,77.259 DC4.1@154.763,77.87
  Mid-Layer 1 w3: U23.2@163.694,82.275 165.96,84.54 TVS1.2@165.96,85.795
  Mid-Layer 2 w1.5: R9.2@56.65,82.104 59.587,79.167 CAP17.2@59.588,74.06 ; R8.2@56.65,98.19 58.254,99.934 59.588,101.128 CAP15.2@59.588,106.234 ; R8.2@56.65,98.191 58.874,97.58 58.735,98.191 59.52,101.28 CAP16.2@59.586,90.147 ; CAP12.2@74.16,86.506 74.16,82.56 75.446,82.052 76.617,81.059 77.569,80.272 78.854,78.036 76.944,81.034 80.881,80.698 80.576,80.272 80.965,80.66 82.367,79.659 ; v1@78.566,98.409 79.142,97.832 v1(84.495,97.832) ; v1@81.644,73.836 83.266,73.709 v1(83.366,73.809) 84.266,72.909 v1(84.266,72.809) ; v7(82.066,98.309) 84.749,95.627 v5(85.077,95.627) ; v1@84.266,73.109 90.566,73.259 92.866,71.709 95.64,71.709 v1(95.64,68.6) v1(100.085,68.6) ; v5(104.704,83.807) 104.778,83.806 v5(106.558,85.586) 108.559,87.588 S2.3@109.298,87.588 109.298,84.206 C17.1@109.448,84.056 119.789,84.056 C9.2@122.545,81.3 122.545,83.127 U2.1@125.045,85.626 ; v5(104.837,52.51) 104.837,49.801 v5(104.769,49.733) 106.462,51.427 v5(107.106,51.427) ; v5@107.691,51.459 115.266,51.459 120.859,45.866 C11.2@122.545,45.866 122.545,47.567 U4.1@125.045,50.066 ; S3.1@109.297,75.516 113.222,75.516 119.015,81.31 C9.2@122.545,81.3 ; S3.3@109.298,70.316 115.495,70.316 C10.2@122.545,63.265 ; S1.3@109.298,104.86 112.216,104.86 113.166,103.909 116.7,103.909 C8.2@122.545,98.064 ; U3.1@125.045,69.878 122.466,64.759 C10.2@122.545,63.265 ; U1.1@125.045,103.406 124.948,103.309 122.545,103.309 C8.2@122.545,98.064 ; v5(107.106,51.427) 109.023,49.509 C19.2@109.448,49.509 109.448,52.891 S4.3@109.298,53.041 108.72,53.041 v5(107.106,51.427) ; C16.2@109.424,96.326 109.85,96.326 111.766,94.409 118.891,94.409 C8.2@122.545,98.064 ; C16.2@109.424,96.326 109.299,96.2 S2.1@109.299,92.788 108.881,92.788 108.266,93.402 104.658,93.402 104.658,93.885 v5(106.506,95.733) 108.831,95.733 C16.2@109.424,96.326 ; C18.2@109.448,61.781 121.061,61.781 C10.2@122.545,63.265 ; C18.2@109.448,61.781 109.299,61.631 S4.1@109.299,58.241 104.609,58.241 v5(104.178,58.672) 104.178,59.143 v5(106.154,61.118) 108.786,61.118 C18.2@109.448,61.781
  Mid-Layer 2 w2: R10.2@56.65,66.016 56.65,65.375 58.966,63.059 58.966,57.573 CAP18.2@60.481,56.059 ; R11.2@69.961,53.895 69.866,53.8 71.543,51.087 CAP14.2@74.16,50.057 ; CAP11.2@74.16,106.826 74.159,111.009 76.691,111.009 v1(76.796,110.904) 82.866,110.903 v1(88.978,110.904) 93.418,106.464 v1(93.418,106.078) ; v5(87.856,58.39) v5(87.95,53.686) ; v5@106.84,85.519 108.313,85.682 C17.1@109.448,84.056 ; CAP4.2@140.666,87.904 137.066,91.059 136.866,101.609 138.782,103.525 CAP3.2@141.047,103.525 ; CAP4.2@140.668,87.904 140.26,87.904 135.316,82.959 135.316,68.059 137.516,65.859 137.516,50.809 139.535,50.809 CAP6.2@141.938,48.407 ; R7.2@150.066,79.459 152.328,78.681 DC4.1@154.763,77.87
  Mid-Layer 2 w5: 80.316,78.959 83.216,74.559
  Bottom Layer w0.254: CAP8.2@133.427,85.817 138.581,85.817 CAP4.2@140.668,87.904 ; CAP9.2@133.554,70.069 136.529,73.045 CAP5.2@140.795,73.045 ; CAP7.2@133.554,101.184 136.293,98.445 CAP1.2@139.768,98.444 139.768,102.244 CAP3.2@141.049,103.525 ; 148.352,86.38 149.937,86.38 150.002,86.445 C4.1@150.002,87.776 C5.1@150.002,90.443 C6.1@150.002,92.856 C7.1@150.002,95.269 ; R7.2@150.066,79.459 150.504,79.897 CAP2.2@150.504,84.347 ; TVS1.2@165.96,85.795 167.184,87.019 C1.1@167.184,90.709 167.203,90.729 C2.1@167.203,95.142
  Bottom Layer w0.5: DR4.2@168.733,107.08 170.466,107.081 170.466,100.177 169.241,98.953
  Bottom Layer w0.75: 151.066,95.709 152.066,96.709 152.066,100.309 152.766,100.309 154.503,102.046 C3.1@154.503,102.635 ; DC2.1@154.001,111.358 153.867,111.495 153.867,113.509 169.315,113.509 170.066,113.059 170.416,112.159 170.316,107.059
  Bottom Layer w1: C3.1@154.503,102.635 154.503,103.746 155.866,105.109 155.866,112.909 ; DC6.1@162.266,99.909 163.666,99.909 163.666,102.509 166.766,102.509 ; DR4.2@168.733,107.08 168.437,107.081 166.766,105.409 166.766,101.428 169.241,98.953
  Bottom Layer w1.5: CAP4.2@140.666,87.904 143.566,86.209 149.467,86.209 ; DR3.1@161.24,101.747 161.24,100.009 161.34,99.909 DC6.1@162.266,99.909 ; 169.241,96.54 169.241,98.953
  Bottom Layer w3: CAP12.2@74.16,86.506 74.159,80.946 77.615,77.49 ; 104.852,104.16 104.979,104.287 113.615,104.287 ; 104.979,75.712 113.742,75.712 ; 105.614,70.251 105.995,69.87 112.599,69.87 ; 106.122,87.015 113.107,87.015 113.742,87.65 ; 106.884,84.038 113.742,84.038 ; 109.805,48.534 112.218,48.534 112.98,47.772 113.615,47.772 113.742,47.899 113.742,75.712 ; 113.742,111.78 113.742,75.712
  Bottom Layer w4: CN3.2@50.497,66.099 50.58,66.016 R10.2@56.65,66.016 ; CN2.2@50.624,85.276 53.966,83.609 R9.2@56.65,82.104 ; CN4.2@50.75,46.542 54.566,48.309 55.966,53.009 CAP18.2@60.481,56.072 ; R8.2@56.65,98.19 56.65,95.593 59.132,93.111 59.132,90.601 CAP16.2@59.588,90.146 59.587,86.708 57.227,84.348 57.227,82.681 R9.2@56.65,82.104 ; R8.2@56.651,98.191 55.366,101.509 50.75,104.091 50.75,106.235 59.587,106.235 59.386,106.435 59.386,110.383 67.204,110.383 74.159,110.383 ; 58.878,69.87 73.016,69.87 CAP13.2@74.16,68.726 ; 59.587,57.974 56.65,60.911 R10.2@56.65,66.016 ; 59.588,57.973 63.566,53.995 69.863,53.995 R11.2@69.961,53.895 ; TVS3.2@69.8,89.513 69.8,86.634 74.032,86.634 CAP12.2@74.16,86.506 CAP11.2@74.16,106.826 74.159,110.383 ; 69.995,69.87 74.6,74.473 77.615,77.49 89.103,77.49 88.976,77.617 v1@88.976,110.891 ; 70.181,72.029 TVS4.2@70.181,74.06 ; 74.159,91.763 88.977,91.763 ; 74.159,102.685 88.977,102.685 ; 88.977,88.412 104.598,88.412 ; v5@104.598,59.075 112.218,59.075 112.218,62.123 104.852,62.123 ; 104.979,106.065 89.104,106.065 88.977,106.192 88.977,110.891 74.667,110.891 74.159,110.383 ; 105.233,96.667 110.313,96.667 111.075,95.905 111.075,94 107.138,94 ; R10.2@56.65,66.016 56.65,71.123 CAP17.2@59.588,74.06 56.65,76.997 R9.2@56.65,82.104
  Bottom Layer w5: CAP14.2@74.16,50.057 70.322,53.895 R11.2@69.961,53.895 70.054,53.988 TVS5.2@70.054,58.144 72.402,58.145 v1(72.666,58.41) 81.151,58.41 v1(81.324,58.583) 84.566,58.709 89.066,59.609 89.267,59.809 87.867,56.71 88.088,48.534 109.805,48.534 109.805,51.582 ; v5@87.961,58.821 89.104,59.964 89.104,77.49 ; 89.104,68.635 89.14,68.6 v1(95.64,68.6) v1(100.085,68.6) 103.963,68.6
  other v1: 81.466,73.71 82.566,80.11 80.366,81.11 78.566,98.41
  other v5: 104.658,93.402
ISNS+: DC5.2 R3.1 U0.6 | length 59.1
  Top Layer w0.5: DC5.2@150.191,106.369 153.067,103.809 157.966,99.659 157.766,97.609 156.216,95.859 154.321,94.993 156.216,93.359 v4@158.342,94.365
  Top Layer w0.75: v5(141.766,83.06) 141.766,83.959 144.316,86.509 145.516,86.509 145.516,86.709 146.116,87.309 146.116,88.809 146.466,88.809 147.266,89.609 148.938,89.609 v3(154.32,94.992)
  Mid-Layer 2 w1: 137.866,70.607 137.866,79.162 v5(141.766,83.06) ; 137.866,70.609 140.92,67.555 R3.1@140.92,67.456
  other v4: 158.342,94.365
ISNS-: DC5.1 R4.1 R5.1 U0.5 | length 105.9
  Top Layer w0.75: R5.1@146.254,67.456 146.207,69.395 146.705,69.977 146.51,71.57 146.515,72.674 147.564,77.109 146.177,80.437 145.476,83.815 146.774,85.847 150.012,87.94 152.245,88.489 154.506,88.717 156.614,90.96 158.765,91.161 159.715,91.811 159.817,92.819 159.415,93.561 v4@159.314,95.11
  Top Layer w2: R5.1@146.254,67.456 146.066,70.108 145.408,70.108 138.365,70.108 136.666,71.81 136.666,108.488 138.916,111.459 DC5.1@150.191,111.358
  Mid-Layer 1 w2: R4.1@143.588,67.457 R5.1@146.254,67.456
  Bottom Layer w0.4: U0.5@158.942,96.056 158.942,95.484 v4(159.316,95.11)
M1_4: DR7.2 M1.4
POTANT1_1: C16.1 CAP11.1 CAP15.1 CN1.1 L2.2 POTANT1.1 TVS2.1 | length 121.9
  Mid-Layer 1 w1.5: CN1.1@50.751,109.707 54.177,106.281 54.177,102.827 ; POTANT1.1@50.878,100.222 53.483,102.827 54.177,102.827 ; L2.2@95.582,99.311 86.675,99.31 79.159,106.826 76.043,103.709 v6(68.966,103.709) 68.966,104.51 v6(67.066,106.409) 66.227,105.57 66.227,103.909 v6(64.066,103.909) 62.984,102.827 54.177,102.827
  Mid-Layer 1 w2.3: v6(64.066,103.909) 64.587,104.431 CAP15.1@64.588,106.234 ; L2.2@95.582,99.311 97.597,101.326 C16.1@109.424,101.326
  Mid-Layer 2 w2: CAP15.1@64.588,106.235 60.466,109.709 CN1.1@50.75,109.707 ; CN1.1@50.75,109.707 53.116,109.759 55.216,104.709 51.98,100.223 50.877,100.223 49.755,100.223 48.167,101.81 48.167,107.86 CN1.1@50.75,109.707
  other v6: 66.766,104.409
POTANT2_1: C17.2 CAP12.1 CAP16.1 CN2.1 L3.2 POTANT2.1 TVS3.1 | length 124.5
  Mid-Layer 1 w1.2: L3.2@95.582,80.98 107.524,80.98 C17.2@109.448,79.056
  Mid-Layer 1 w2.3: POTANT2.1@50.751,81.045 51.883,82.177 53.477,82.177 53.477,87.423 CN2.1@50.624,90.276 50.624,89.629 53.027,87.227 61.668,87.227 CAP16.1@64.588,90.146 ; L3.2@95.582,80.98 90.056,86.506 79.159,86.506 77.927,87.738 77.927,90.146 CAP16.1@64.588,90.146 ; CAP16.1@64.588,90.146 64.766,90.325 v3(64.766,92.509) ; v3(64.766,92.509) 65.366,91.909 v3(66.666,91.909) 67.766,93.009 v3(67.766,93.809) v3(67.766,95.41) 67.566,95.609 v3(65.266,95.609) 65.266,95.209 v3(64.066,94.009) 64.066,93.209 v3(64.766,92.509)
  Mid-Layer 2 w3: CN2.1@50.623,90.276 56.765,85.409 ; POTANT2.1@50.75,81.046 55.817,85.409 56.765,85.409 ; 55.066,85.409 56.765,85.409 ; CAP16.1@64.588,90.146 64.565,86.11 57.466,86.11 56.765,85.409
POTANT2_2: POTANT2.2 POTANT2.3 R9.1 U2.2 | length 86.4
  Mid-Layer 1 w1.2: R9.1@66.95,82.105 76.171,82.105 80.765,77.51 84.067,77.51 93.127,71.977 102.627,77.077 112.527,77.277 112.157,81.51 114.616,84.509 117.265,87.309 125.017,87.309 U2.2@125.045,87.337
  Mid-Layer 1 w1.5: v7@53.247,75.564 56.366,75.564 63.067,81.96 66.856,82.008 R9.1@66.95,82.105
  other v7: 53.247,75.564
POTANT3_1: C18.1 CAP13.1 CAP17.1 CN3.1 L4.2 POTANT3.1 TVS4.1 | length 167.7
  Mid-Layer 1 w1.2: POTANT3.1@50.751,61.868 51.11,62.227 52.027,62.227 53.327,63.527 53.327,66.427 50.497,69.256 CN3.1@50.497,71.099 64.477,71.099 64.477,73.95 64.587,74.06 64.587,76.29 v3(64.367,76.51) 65.118,76.51 v3(67.016,78.409) 69.476,78.409 79.159,68.726 89.506,68.726 L4.2@95.582,62.65 99.714,66.781 C18.1@109.448,66.781
  Mid-Layer 2 w3: CN3.1@50.496,71.099 53.466,68.109 53.466,64.584 POTANT3.1@50.75,61.869 ; 53.216,68.859 61.627,71.099 CAP17.1@64.588,74.06 ; CAP17.1@64.367,73.84 v3(64.367,76.51) v3@64.416,76.509 ; v3@64.416,76.459 64.366,76.459 v3(67.016,78.409) 72.866,78.409 CAP13.1@79.16,68.726 88.666,68.809 90.466,67.409 92.666,65.409 L4.2@95.582,62.65 ; L4.2@95.581,62.651 101.708,62.651 106.666,66.611 109.277,66.611 C18.1@109.448,66.781
POTANT4_1: C19.1 CAP14.1 CAP18.1 CN4.1 L5.2 POTANT4.1 TVS5.1 | length 178.4
  Mid-Layer 1 w1.2: v3(66.266,62.509) v3@66.166,62.41 ; v3(67.766,62.609) 67.566,62.41 v3@66.166,62.41 ; C19.1@109.448,44.509 109.259,44.319 L5.2@95.582,44.32 89.845,50.057 79.159,50.057 78.277,50.939 78.277,53.877 73.877,53.877 71.727,51.727 61.184,51.727 59.26,49.803 57.522,51.541 CN4.1@50.751,51.541 55.249,51.541 55.535,51.827 55.535,56.397 59.027,59.889 63.694,59.889 63.694,62.238 v3(63.866,62.41) v3@66.166,62.41
  Mid-Layer 2 w3: CN4.1@50.751,51.541 54.935,51.541 56.066,50.409 58.654,50.409 POTANT4.1@59.26,49.803 ; POTANT4.1@59.259,49.804 61.266,51.81 63.666,51.81 63.666,52.61 64.967,53.911 64.967,58.617 CAP18.1@63.694,59.89 ; v3(66.266,62.509) v3(67.766,62.609) 72.866,62.709 76.266,59.009 76.266,52.95 CAP14.1@79.16,50.057 89.845,50.057 L5.2@95.582,44.32 109.259,44.319 C19.1@109.448,44.509 ; v3(66.266,62.509) v3(63.866,62.41) CAP18.1@63.694,59.89 ; CAP18.1@63.694,59.89 64.565,60.908 CAP18.1@63.694,59.89
R2_1: C1.2 C2.2 C3.2 CAP1.1 F1.2 R1.1 R2.1 R3.2 | length 210.5
  Top Layer w1: R2.1@160.464,75.9 160.464,75.86 161.564,73.861 162.766,73.81 166.314,76.711 167.965,76.711 170.566,79.311 170.566,87.01 169.817,87.76 168.064,87.76 167.716,88.11 167.015,88.11 166.515,88.61 162.961,88.61 R1.1@160.986,86.633
  Top Layer w1.25: R1.1@160.986,86.633 162.27,86.634 165.227,83.678 165.326,83.678 167.427,81.577 166.577,79.877
  Top Layer w1.5: R2.1@160.466,75.899 160.616,79.659 166.577,79.877
  Top Layer w2: v8@163.816,95.309 163.816,90.259 v8(164.066,90.009) 164.066,88.722 163.954,88.61
  Mid-Layer 1 w1: F1.2@166.066,58.313 168.113,58.314 169.227,59.427
  Mid-Layer 1 w1.75: v9(143.566,99.359) 144.566,100.359 148.34,100.359 149.14,101.159 149.316,101.159 150.816,102.659 v6(151.516,102.659)
  Mid-Layer 1 w2: 137.023,96.553 141.915,97.709 v9(143.566,99.359) ; R3.2@140.92,59.836 140.92,61.454 136.917,65.458 132.866,76.459 132.665,88.559 136.917,96.509 141.308,97.569 ; R2.1@160.466,75.899 160.566,75.799 161.966,71.909 161.966,69.809 165.516,66.259 165.516,58.864 F1.2@166.066,58.313
  Mid-Layer 1 w3: 164.826,89.827 169.827,89.777 172.476,86.119 172.476,64.778 166.065,58.367 F1.2@166.066,58.313
  Bottom Layer w0.254: C2.2@163.816,95.309 164.066,95.059 v8(164.066,90.009)
  Bottom Layer w1.5: CAP1.1@143.089,98.444 143.566,98.922 v9(143.566,99.359) 144.716,99.359 145.466,100.109 149.066,101.009 C3.2@151.468,102.635
  Bottom Layer w3: F1.2@166.066,58.313 166.066,69.809
  other v8: 163.816,95.309
R4_2: L1.1 R1.2 R2.2 R4.2 | length 168.1
  Top Layer w0.5: 157.166,84.708 158.707,85.446 159.016,86.009 160.461,89.009 160.016,89.461
  Top Layer w1.5: L1.1@151.915,56.153 156.691,51.377 v6(164.527,51.377) ; 154.154,85.313 155.716,87.309 157.367,89.509 160.016,89.459 161.516,90.259 161.575,92.946 R1.2@160.986,94.253
  Top Layer w2: R4.2@143.587,59.836 143.627,59.797 143.627,57.327 144.8,56.153 L1.1@151.915,56.153 ; L1.1@151.913,56.154 153.778,57.622 154.331,59.867 153.257,62.851 151.367,74.558 153.115,80.56 151.916,82.559 152.89,84.703 154.921,86.024 157.979,85.046 R2.2@160.135,83.662
  Mid-Layer 1 w1: R4.2@143.588,59.837 147.271,56.153 L1.1@151.915,56.153
  Mid-Layer 2 w1.5: R2.2@160.466,83.519 161.469,83.52 162.161,84.211 162.561,84.211 163.477,85.127 163.727,85.127 164.649,84.204 164.741,84.204 164.741,84.158 164.805,84.158 164.805,84.121 164.859,84.121 164.859,84.087 164.913,84.087 164.913,84.051 164.974,84.051 170.525,78.499 170.525,77.627 170.527,76.777 171.928,74.927 171.928,57.076 167.521,52.669 v6(164.527,51.377)
  Mid-Layer 2 w2: R4.2@143.587,59.836 143.586,57.315 144.75,56.154 L1.1@151.915,56.153
  Bottom Layer w1: R2.2@160.466,83.519 160.233,83.52 157.427,84.827 156.477,87.277 156.477,89.276 159.626,89.276 161.628,91.277 161.628,93.614 R1.2@160.986,94.253
R5_2: DC1.1 L1.2 M1.5 M1.6 M1.7 M1.8 M1.9 M2.1 M2.2 M2.3 pad.1 pad.2 R5.2 U0.12 | length 127.6
  Top Layer w2: pad.1@133.099,105.644 132.968,71.536 134.015,66.949 pad.2@134.087,63.851 ; pad.2@134.116,63.909 v6(147.066,63.909) 147.066,63.009 v6(148.266,61.809) ; v6@148.266,61.909 v6@150.398,61.767
  Mid-Layer 1 w3: v6(147.066,63.909) 148.266,62.71 v6(148.266,61.809) v6@150.866,61.809 ; v6(150.866,61.909) 151.966,60.81 v6(151.966,59.71) 152.166,59.909 157.016,59.909 ; v8(158.666,62.809) 158.666,61.109 158.566,61.109 157.366,59.909 157.016,59.909 ; L1.2@160.914,56.153 160.772,56.153 157.016,59.909
  Mid-Layer 2 w1.75: pad.1@133.116,105.709 133.116,105.609 135.967,110.108 138.916,111.459 142.038,111.424 144.116,109.059 155.176,109.108 156.501,110.599 DC1.1@157.811,111.358
  Bottom Layer w0.3: U0.12@156.665,98.311 156.469,98.311 156.365,99.06 156.766,99.758 157.015,100.01 157.264,100.211 157.216,103.109 157.866,103.911 158.565,103.911 158.765,104.11 159.202,104.128 159.582,104.91 159.636,108.387 159.001,109.159 158.29,109.164 157.81,109.713 DC1.1@157.81,111.359
  other v8: 156.516,60.76
S2_2: L3.1 S2.2 U2.3 | length 61.6
  Top Layer w1.5: L3.1@95.582,93.98 99.865,91.31 103.579,90.203 S2.2@109.298,90.188
  Mid-Layer 1 w1.5: S2.2@109.298,90.188 109.47,90.359 117.816,90.359 119.129,89.216 U2.3@125.045,89.046
  Mid-Layer 2 w1.6: 123.566,88.959 123.653,89.047 U2.3@125.045,89.046
  Mid-Layer 2 w2.5: L3.1@95.581,93.979 102.416,90.209 109.297,90.187 117.628,90.266 119.567,89.245 123.566,88.959
U0_2: DC2.2 U0.2 | length 16.3
  Top Layer w0.6: DC2.2@154.001,106.369 155.85,104.51 159.066,104.51 160.166,103.118 159.465,101.315 159.117,100.71 159.066,99.41 159.116,98.559 159.366,97.709 160.216,97.509 v10@160.915,97.959
  Bottom Layer w0.3: U0.2@159.696,97.791 160.748,97.791 v10(160.916,97.959)
U0_8: DR7.1 U0.8 | length 58.4
  Mid-Layer 2 w0.4: v4(157.239,95.469) 155.677,93.906 154.977,93.427 153.327,93.426 151.277,92.477 150.226,90.477 150.226,82.476 148.826,81.077 148.778,81.077 148.326,80.627 148.326,77.577 150.426,75.476 154.079,75.476 156.327,73.228 162.728,73.228 164.328,74.826 164.328,75.077 166.327,77.076 166.926,77.076 166.926,78.377 165.476,79.827 162.126,79.827 161.277,80.678 159.578,80.678 158.034,82.22 DR7.1@157.316,82.219
  Bottom Layer w0.4: v4@157.24,95.47 157.391,95.687 U0.8@157.401,96.262
U0_10: DR5.1 U0.10 | length 21.7
  Mid-Layer 2 w0.5: v3@155.515,96.86 155.317,96.659 153.315,96.71 152.117,98.66 153.067,100.809 153.066,103.159 155.665,105.01 155.811,106.051 155.8,106.735 ; 155.8,106.732 157.265,108.109 159.267,109.91 159.974,111.238 DR5.1@161.113,111.906
  other v3: 155.516,96.859
U0_11: DC1.2 DD1.1 U0.11 | length 46.4
  Mid-Layer 1 w0.6: v6@155.866,99.808 157.067,100.309 158.766,100.309 162.316,99.809 163.216,101.409 163.816,102.209 164.316,103.71 v6@164.166,106.11
  Mid-Layer 1 w1: DC1.2@157.811,106.359 155.916,108.559 155.916,112.209 157.364,113.55 163.318,113.514 164.166,112.509 v6(164.166,106.11)
  Bottom Layer w0.3: v6(155.866,99.809) 155.866,97.809 U0.11@156.692,97.804 156.106,97.804
  Bottom Layer w0.4: v6(155.866,99.809) 156.366,100.309 156.366,103.409 157.812,104.855 DC1.2@157.811,106.359
U0_13: M2.4 U0.13 | length 61.9
  Mid-Layer 1 w1: v3@155.865,64.11 152.865,68.11 146.563,70.066 140.358,69.809 139.022,70.442 137.952,72.601 137.726,75.692 137.991,78.494 139.106,82.245 140.045,84.221 140.383,85.468 142.578,85.631 143.349,87.011 142.565,88.41 142.565,91.11 143.764,92.311 147.465,92.311 150.955,92.431 153.017,93.21 154.866,93.708 156.515,96.21 156.784,97.668 v4(157.021,98.971)
  other v3: 155.866,64.11
U1_2: POTANT1.2 POTANT1.3 R8.1 U1.2 | length 84.1
  Mid-Layer 1 w1.5: v7@53.267,95.01 61.667,98.109 66.869,98.109 66.95,98.191 75.566,98.208 77.867,95.91 80.966,95.91 88.065,88.81 97.766,88.81 101.167,92.209 101.167,94.109 105.967,98.909 113.867,98.909 120.067,105.109 U1.2@125.045,105.116
  other v7: 53.266,95.009
U1_3: L2.1 S1.2 U1.3 | length 82.9
  Top Layer w1.5: L2.1@95.581,112.31 99.815,112.31 101.517,110.609 101.517,108.859 105.216,108.859 106.615,107.459 S1.2@109.297,107.459
  Mid-Layer 1 w1.5: S1.2@109.248,107.459 117.807,107.45 120.466,107.009 U1.3@124.996,106.827
  Mid-Layer 1 w2: L2.1@95.581,112.31 95.666,109.109 98.066,107.609 S1.2@109.297,107.459
  Mid-Layer 2 w1.5: S1.2@109.248,107.459 118.615,107.459 120.632,106.84 U1.3@124.996,106.827
  Mid-Layer 2 w2: L2.1@95.631,112.36 95.716,109.159 98.116,107.659 S1.2@109.347,107.509
U1_4: C12.1 U1.4 | length 3.1
  Bottom Layer w0.75: U1.4@125.045,108.536 125.045,108.208 127.331,108.208 C12.1@127.331,108.694
U2_4: C13.1 U2.4 | length 3.2
  Bottom Layer w0.75: U2.4@125.045,90.756 125.193,90.609 127.585,90.609 C13.1@127.585,91.168
U2_5: C9.1 C13.2 CAP4.1 CAP8.1 F3.2 U2.5 | length 14.7
  Bottom Layer w0.254: CAP8.1@133.427,94.817 135.26,92.984 CAP4.1@140.668,92.984 141.128,92.524 F3.2@144.222,92.523
  Bottom Layer w0.75: U2.5@125.045,92.468 125.045,92.709 127.136,92.709 C13.2@127.585,92.26
  other v3: 129.966,92.709 130.066,95.209
U3_2: POTANT3.2 POTANT3.3 R10.1 U3.2 | length 83.7
  Mid-Layer 1 w1.5: v7(53.107,56.441) 61.065,65.811 66.745,65.811 66.95,66.016 71.561,66.016 75.066,62.509 89.366,62.509 91.865,60.009 97.716,60.009 102.066,64.309 112.316,64.309 114.916,68.209 119.87,71.534 U3.2@125.045,71.589
U3_3: L4.1 S3.2 U3.3 | length 60.7
  Top Layer w1.5: L4.1@95.582,75.65 98.316,72.916 S3.2@109.298,72.916
  Mid-Layer 1 w1.5: S3.2@109.298,72.916 119.366,74.009 U3.3@125.045,73.298
  Mid-Layer 2 w1.5: S3.2@109.298,72.916 116.594,72.829 120.366,73.309 U3.3@125.045,73.298
  Mid-Layer 2 w2: L4.1@95.582,75.65 102.416,73.009 109.205,73.009 S3.2@109.298,72.916
U3_4: C14.1 U3.4 | length 2.1
  Bottom Layer w1.5: U3.4@125.045,75.008 127.166,75.009
U4_2: POTANT4.2 POTANT4.3 R11.1 U4.2 | length 71.9
  Mid-Layer 1 w1.5: R11.1@64.053,45.457 87.227,42.177 91.427,42.077 103.827,42.477 116.427,42.777 113.166,47.109 117.866,51.809 125.012,51.809 U4.2@125.045,51.776
  other v7: 61.886,44.274
U4_3: L5.1 S4.2 U4.3 | length 75.4
  Top Layer w1.5: L5.1@95.582,57.319 97.26,55.641 S4.2@109.298,55.641
  Mid-Layer 1 w1.5: L5.1@95.582,57.319 97.26,55.641 102.916,55.641 S4.2@109.298,55.641 118.016,54.859 120.816,54.259 U4.3@125.045,53.486
  Mid-Layer 2 w1.5: S4.2@109.297,55.64 117.034,55.64 119.165,53.509 U4.3@125.045,53.486
  Mid-Layer 2 w2: L5.1@95.582,57.319 102.716,55.359 109.267,55.609 S4.2@109.298,55.641
U4_4: C15.2 U4.4 | length 2.2
  Bottom Layer w1.5: U4.4@125.045,55.196 127.077,55.196 127.066,55.409
VCC: DD1.2 DR1.2 DR5.2 | length 8.9
  Top Layer w1: DR5.2@168.774,111.82 DR1.2@168.784,109.478
  Bottom Layer w2: DR1.2@168.733,109.493 DR5.2@168.733,111.906
  Bottom Layer w3: DD1.2@164.066,110.809 168.166,110.809
VIN: DC6.2 DR2.2 U0.7 | length 36.7
  Top Layer w0.5: v4(157.766,94.909) 158.716,96.109 160.367,95.811 161.167,95.811 ; 161.166,95.809 162.54,97.183 v6(162.54,97.481)
  Top Layer w1: v6@162.579,97.345 162.68,97.345 v6@162.985,97.65 ; 163.054,97.685 164.034,97.685 164.339,97.38 170.877,97.378 170.913,103.204 170.11,104.541 DR2.2@168.776,104.66
  Mid-Layer 1 w0.75: v6@162.541,97.482 163.765,98.706 163.916,100.309 166.016,102.359 166.762,104.64 DR2.2@168.733,104.667
  Bottom Layer w0.3: v4(157.766,94.909) 157.875,95.019 157.875,95.383 157.938,95.498 U0.7@157.938,96.349
  Bottom Layer w0.75: DC6.2@162.266,98.489 162.266,97.773 v6@162.56,97.479
copper on no net:
  other v11: 144.766,96.059